# Altium PCB 4Z_PCB_2.PcbDoc (part 1 of 2)
Units mm, origin at the board's own origin, x right, y up, seen from the top; angles counter-clockwise.
Board outline 89.86 x 89.86 mm, 2 copper layers (Top Layer, Bottom Layer); 100 components, 102 nets, 472 pads, 154 vias.
Unrouted connection lines stored in the file: 1.
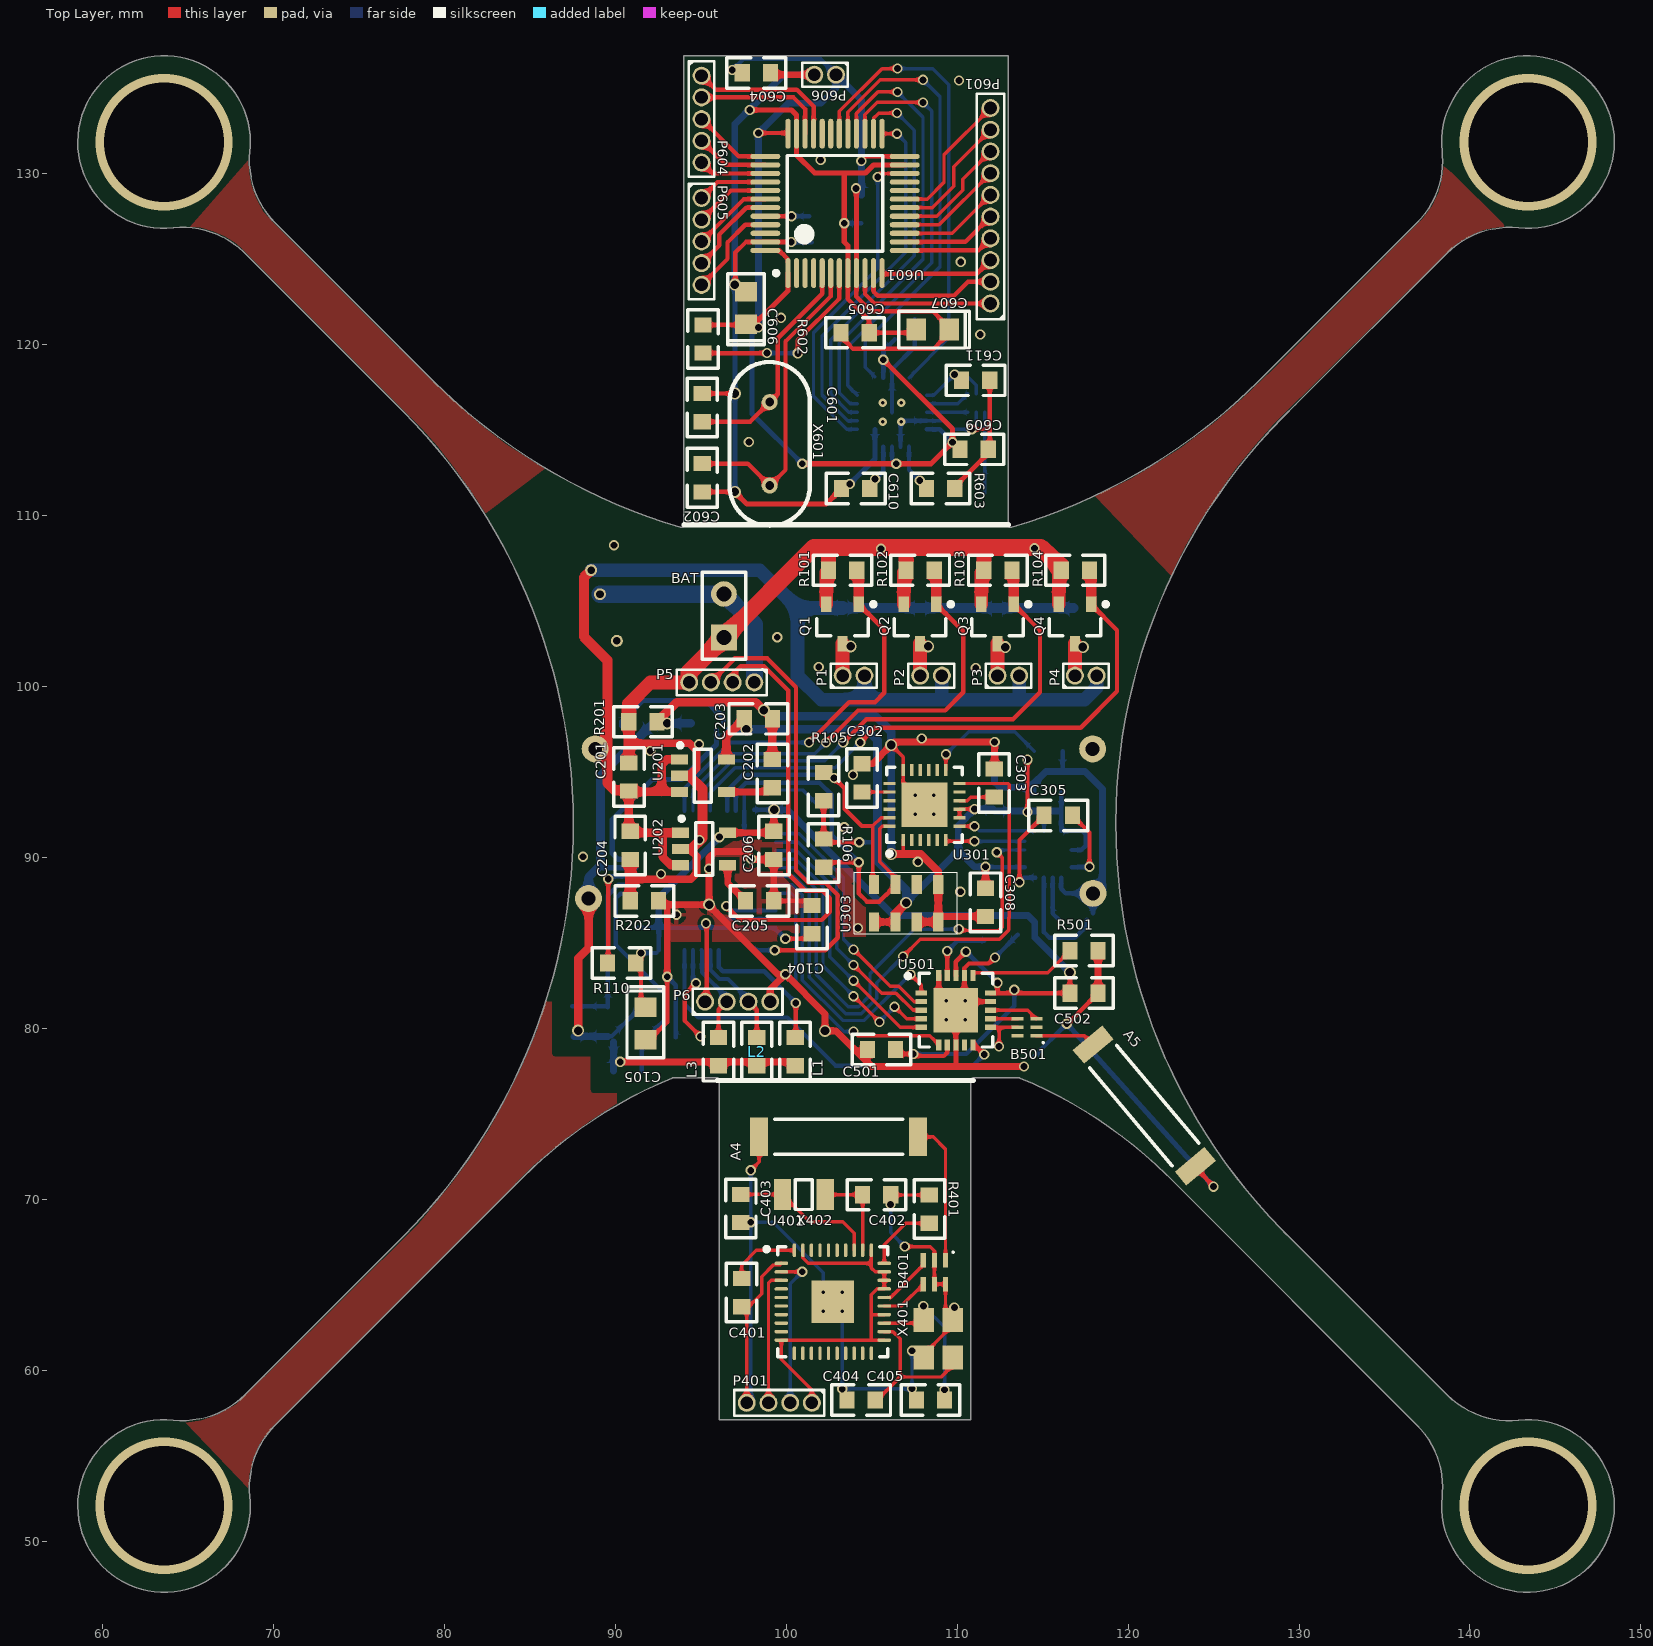
[diagram p0: Top Layer view]
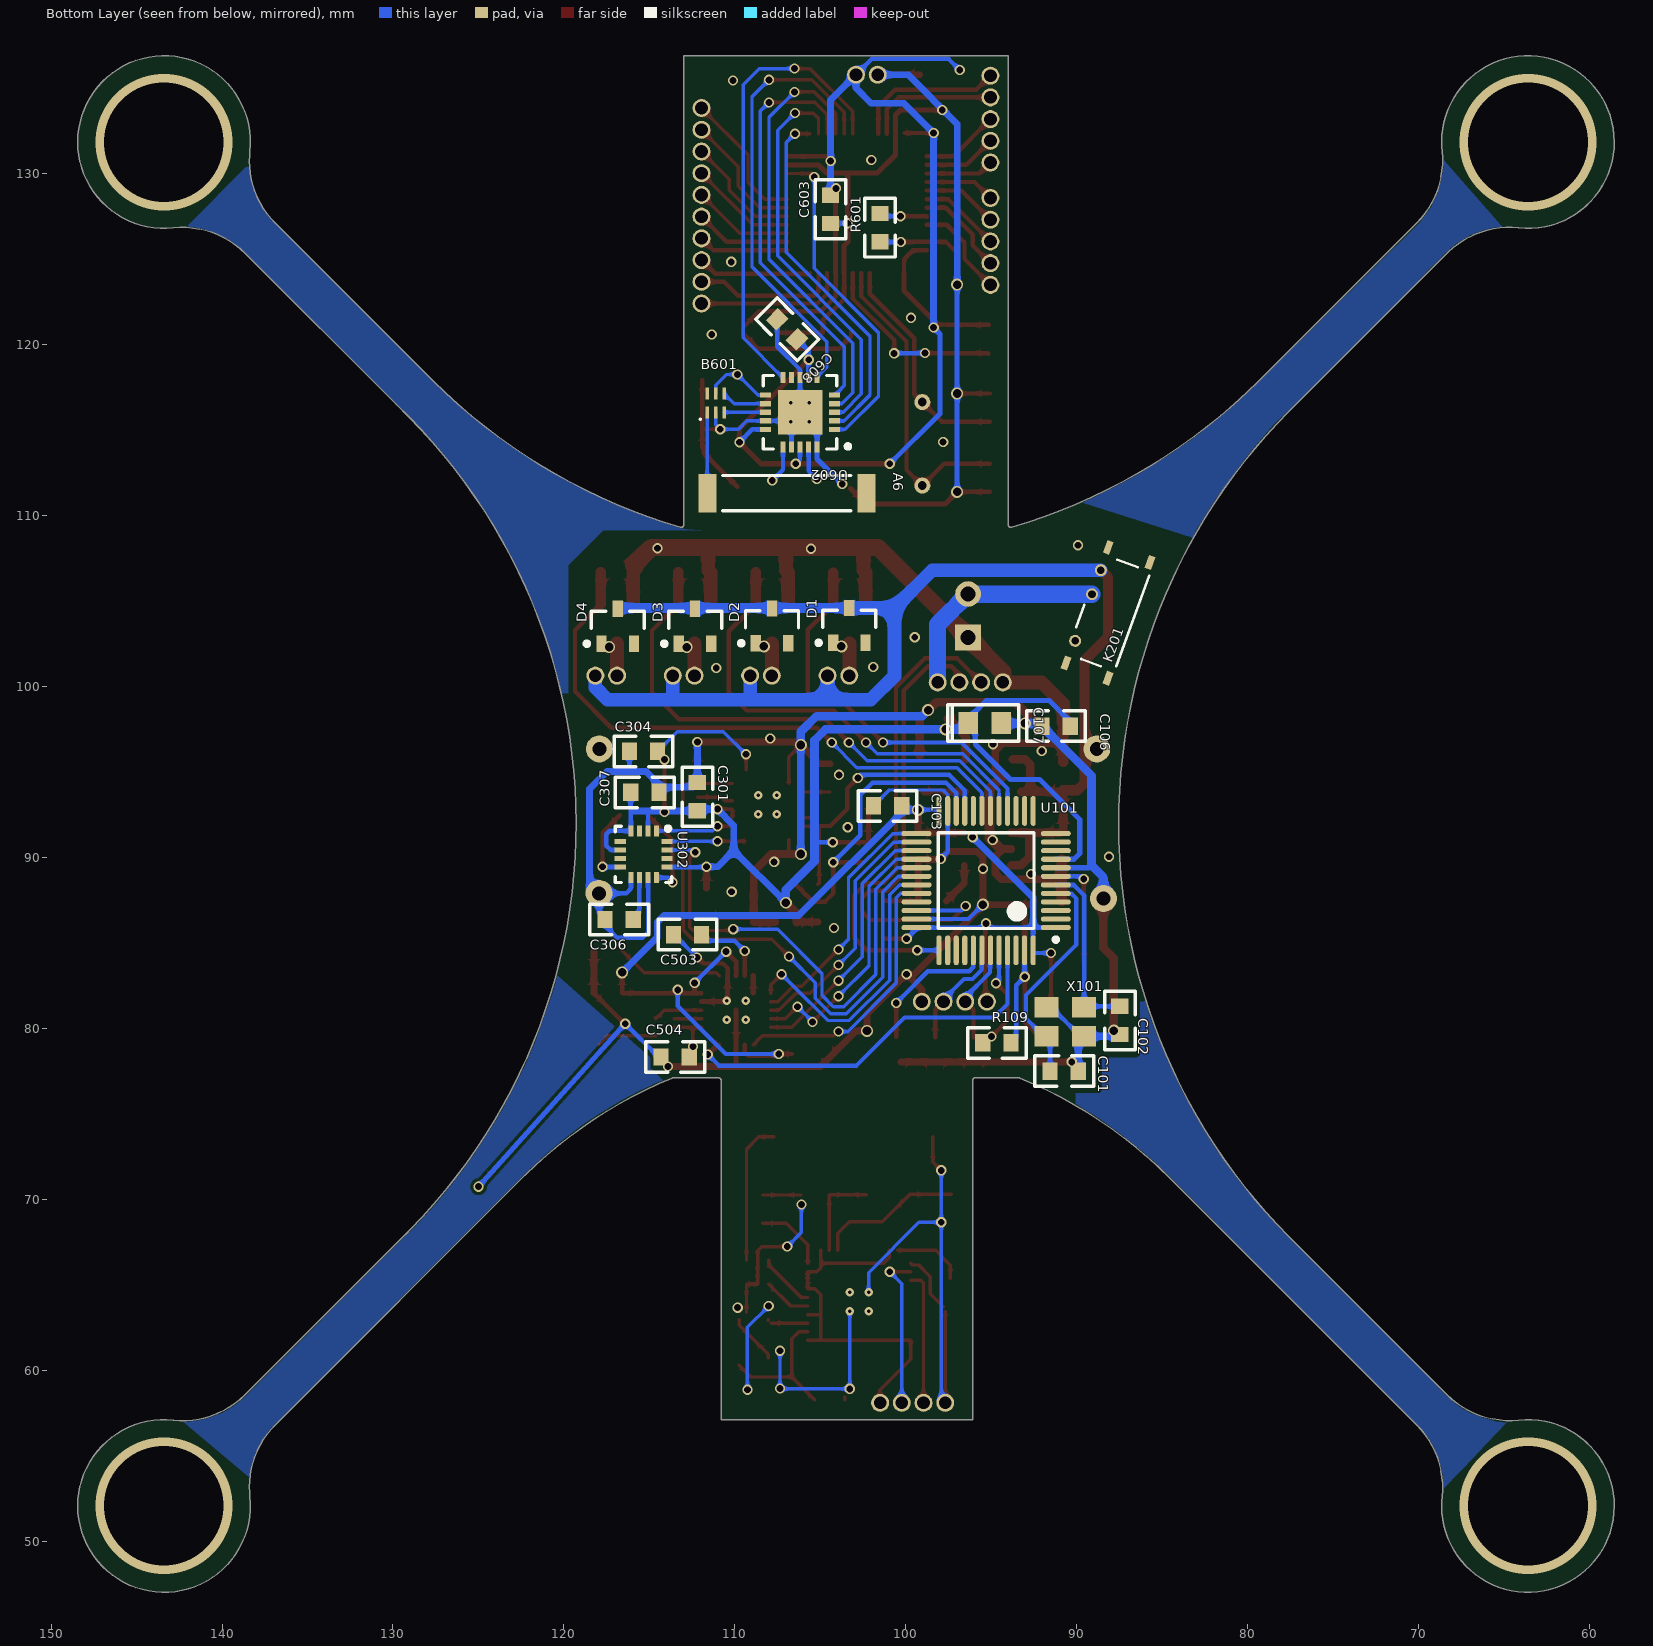
[diagram p1: Bottom Layer view, seen from below]

## Layer stack, top to bottom
Top Solder: solder mask 0.0102, Solder Resist, Dk 3.5
Top Layer: signal copper 0.0356
Dielectric 1: dielectric 0.32, FR-4, Dk 4.8
Bottom Layer: signal copper 0.0356
Bottom Solder: solder mask 0.0102, Solder Resist, Dk 3.5

## Board outline
64.166,57.09 ccw(c63.626,52.069) 68.676,52.069 ccw(c63.626,52.069) 68.647,52.609 cw(c73.768,53.16) 70.126,56.802 84.588,71.264 cw(c103.507,52.345) 93.329,77.089 cw(c93.387,76.95) 93.387,77.1 95.957,77.1 cw(c95.957,76.95) 96.107,76.95 96.107,57.1 110.807,57.1 110.807,76.95 cw(c110.957,76.95) 110.957,77.1 113.627,77.1 cw(c113.627,76.95) 113.684,77.089 cw(c103.507,52.345) 122.26,71.428 cw(c122.167,71.31) 122.273,71.416 136.888,56.802 ccw(c136.782,56.695) 136.888,56.802 cw(c133.246,53.16) 138.397,53.16 cw(c133.246,53.16) 138.367,52.609 ccw(c143.388,52.069) 148.437,52.069 ccw(c143.388,52.069) 142.848,57.09 cw(c142.297,62.211) 138.687,58.538 cw(c138.787,58.649) 138.681,58.543 138.665,58.559 cw(c138.772,58.665) 138.665,58.559 cw(c138.772,58.665) 138.664,58.56 ccw(c142.297,62.211) 138.665,58.559 ccw(c142.297,62.211) 138.667,58.557 cw(c138.772,58.665) 138.665,58.559 138.655,58.569 129.417,67.807 ccw(c153.136,91.956) 129.417,67.807 cw(c153.136,91.956) 128.987,68.237 cw(c153.136,91.956) 129.803,116.479 138.655,125.331 cw(c142.297,121.689) 142.848,126.81 ccw(c143.388,131.831) 148.437,131.831 ccw(c143.388,131.831) 138.367,131.291 cw(c133.246,130.74) 138.397,130.74 cw(c133.246,130.74) 136.888,127.098 ccw(c136.782,127.205) 136.888,127.098 127.65,117.86 cw(c127.543,117.966) 127.649,117.859 cw(c103.507,142.17) 113.191,109.306 cw(c113.149,109.45) 112.998,109.45 112.998,136.88 94.015,136.88 94.015,109.45 cw(c93.865,109.45) 93.822,109.306 cw(c103.507,142.17) 79.365,117.859 cw(c79.471,117.966) 79.364,117.86 79.365,117.859 79.364,117.86 70.126,127.098 ccw(c70.232,127.205) 70.126,127.098 cw(c73.768,130.74) 68.647,131.291 ccw(c63.626,131.831) 68.676,131.831 ccw(c63.626,131.831) 64.166,126.81 cw(c64.717,121.689) 68.27,125.417 cw(c68.18,125.297) 68.286,125.403 68.359,125.331 77.597,116.093 cw(c77.491,115.986) 77.598,116.092 cw(c53.33,91.95) 87.561,91.95 cw(c53.33,91.95) 77.598,67.808 cw(c77.491,67.914) 77.597,67.807 77.598,67.808 77.597,67.807 68.359,58.569 ccw(c68.252,58.675) 68.359,58.569 cw(c64.717,62.211)

## Design rules (kind name [scope] priority, off if disabled: settings)
Clearance [All] p1: gap=0.2
PolygonConnect [All] p1: connectstyle=Relief reliefconductorwidth=0.254 reliefentries=4 polygonreliefangle="90 Angle" airgapwidth=0.254
RoutingVias [All] p1: holewidth=0.4 width=0.6 viastyle="Through Hole" minholewidth=0.4 minwidth=0.6 maxholewidth=7 maxwidth=8
SolderMaskExpansion [All] p1: expansion=0.102
Width [All] p1: maxlimit=1 minlimit=0.2 preferedwidth=0.254 minimp=50.000000 maximp=50.000000 favimp=50.000000
30 further rules are at their usual default settings.

## Classes and differential pairs
component class 24L10S: A6 B601 C601 C602 C603 C604 C605 C606 C607 C608 C609 C610 C611 P601 P604 P605 P606 R601 R602 R603 U601 U602 X601
component class 4Z_PCB_2: C101 C102 C103 C104 C105 C106 C107 D1 D2 D3 D4 L1 L2 L3 P1 P2 P3 P4 P5 P6 Q1 Q2 Q3 Q4 R101 R102 R103 R104 R105 R106 R109 R110 U101 X101
component class IIC_Sensor: C301 C302 C303 C304 C305 C306 C307 C308 U301 U302 U303
component class nRF24L01: A5 B501 C501 C502 C503 C504 R501 U501
component class Power: BAT C201 C202 C203 C204 C205 C206 K201 R201 R202 U201 U202
component class Bluetooth: A4 B401 C401 C402 C403 C404 C405 P401 R401 U401 X401 X402

## Components (designator, comment, footprint, x,y, rotation, side; value= is the part's Value field where it differs from the comment)
A4 "AN9520-245" AN9520-245 103.08,73.65 r180 top locked
A5 "AN9520-245" AN9520-245 120.95,75.49 r310 top locked
A6 "AN9520-245" AN9520-245 106.97,111.305 r180 bottom locked
B401 "2450BM15A0002E" 2450BM15A0002 108.675,65.735 r270 top locked
B501 "2450BN14A0002" 2450BM14A0002 114.09,80.06 r180 top locked
B601 "2450BN14A0002" 2450BM14A0002 111.13,116.57 r90 bottom locked
BAT "BAT" XH254 96.37,102.86 r90 top locked
C101 "20pF" 0603 90.72,77.47 r0 bottom locked
C102 "20pF" 0603 87.52,80.44 r90 bottom locked
C103 "100nF" 0603 101.095,93.04 r180 bottom locked
C104 "100nF" 0603 101.55,86.38 r270 top locked
C105 "C0805" 0805 91.775,80.285 r270 top locked
C106 "100nF" 0603 91.245,97.705 r180 bottom locked
C107 "C0805" 0805 95.395,97.855 r180 bottom locked
C201 "0.1uF" 0603 90.836,94.724 r270 top locked
C202 "0.01uF" 0603 99.233,94.924 r270 top locked
C203 "2.2uF" 0603 98.403,98.074 r180 top locked
C204 "0.1uF" 0603 90.858,90.674 r90 top locked
C205 "0.01uF" 0603 98.483,87.424 r180 top locked
C206 "2.2uF" 0603 99.258,90.674 r90 top locked
C301 "10nF" 0603 112.171,93.57 r270 bottom locked
C302 "2.2nF" 0603 104.475,94.67 r270 top locked
C303 "100nF" 0603 112.2,94.371 r270 top locked
C304 "100nF" 0603 115.375,96.225 r180 bottom locked
C305 "0.22uF" 0603 115.895,92.485 r0 top locked
C306 "4.7uF" 0603 116.795,86.395 r180 bottom locked
C307 "100nF" 0603 115.25,93.77 r0 bottom locked
C308 "100nF" 0603 111.635,87.345 r90 top locked
C401 "1uF" 0603 97.43,64.57 r270 top locked
C402 "" 0603 105.32,70.24 r180 top locked
C403 "" 0603 97.325,69.44 r90 top locked
C404 "" 0603 104.37,58.293 r0 top locked
C405 "" 0603 108.475,58.235 r180 top locked
C501 "10nF" 0603 105.56,78.79 r0 top locked
C502 "100nF" 0603 117.4,82.09 r0 top locked
C503 "33nF" 0603 112.8,85.51 r180 bottom locked
C504 "2.2nF" 0603 113.52,78.35 r180 bottom locked
C601 "22p" 0603 95.128,116.325 r270 top locked
C602 "22p" 0603 95.07,112.175 r90 top locked
C603 "100nF" 0603 104.44,127.875 r90 bottom locked
C604 "100nF" 0603 98.285,135.85 r180 top locked
C605 "10nF" 0603 104.06,120.65 r180 top locked
C606 "10uF" 0805 97.655,122.12 r90 top locked
C607 "1uF" 0805 108.58,120.864 r180 top locked
C608 "10nF" 0603 106.945,120.92 r225 bottom locked
C609 "100nF" 0603 111.03,113.835 r180 top locked
C610 "33nF" 0603 104.05,111.6 r0 top locked
C611 "2.2nF" 0603 111.115,117.87 r180 top locked
D1 "BAT54" BAT54 103.31,103.735 r90 bottom locked
D2 "BAT54" BAT54 107.835,103.71 r90 bottom locked
D3 "BAT54" BAT54 112.335,103.685 r90 bottom locked
D4 "BAT54" BAT54 116.86,103.685 r90 bottom locked
K201 "32开关" 32k 88.18,104.3 r290 bottom locked
L1 "" 0603 100.5,78.61 r90 top locked
L2 "" 0603 98.26,78.61 r90 top locked
L3 "" 0603 96.02,78.61 r90 top locked
P1 "DIP_2" DIP_2 103.95,100.63 r0 top locked
P2 "DIP_2" DIP_2 108.48,100.63 r0 top locked
P3 "DIP_2" DIP_2 113,100.63 r0 top locked
P4 "DIP_2" DIP_2 117.53,100.63 r0 top locked
P5 "DIP_4" DIP_4 96.24,100.23 r180 top locked
P6 "" DIP_4 97.17,81.56 r0 top locked
P401 "DIP_4" DIP_4 99.607,58.098 r180 top locked
P601 "DIP10_1.27mm" DIP10_1.27mm 111.96,128.105 r90 top locked
P604 "DIP_5_1.27mm" DIP_5_1.27mm 95.06,133.175 r270 top locked
P605 "DIP_5_1.27mm" DIP_5_1.27mm 95.06,126.02 r270 top locked
P606 "DIP_2" DIP_2 102.29,135.77 r180 top locked
Q1 "PMV31XN" SOT23-TO236AB 103.307,103.651 r270 top locked
Q2 "PMV31XN" SOT23-TO236AB 107.837,103.651 r270 top locked
Q3 "PMV31XN" SOT23-TO236AB 112.366,103.651 r270 top locked
Q4 "PMV31XN" SOT23-TO236AB 116.896,103.651 r270 top locked
R101 "10K" 0603 103.33,106.76 r180 top locked
R102 "10K" 0603 107.87,106.76 r180 top locked
R103 "10K" 0603 112.41,106.76 r180 top locked
R104 "10K" 0603 116.94,106.76 r180 top locked
R105 "2.2K" 0603 102.17,94.11 r90 top locked
R106 "2.2K" 0603 102.228,90.27 r270 top locked
R109 "100K" 0603 94.71,79.18 r180 bottom locked
R110 "22K" 0603 90.36,83.85 r0 top locked
R201 "0R" 0603 91.657,97.899 r180 top locked
R202 "0R" 0603 91.737,87.424 r180 top locked
R401 "56K" 0603 108.415,69.45 r270 top locked
R501 "22K" 0603 117.4,84.57 r0 top locked
R601 "100K" 0603 101.55,126.8 r90 bottom locked
R602 "22K" 0603 95.115,120.29 r90 top locked
R603 "22K" 0603 109.015,111.6 r0 top locked
U101 "STM32F103CB" LQFP48 95.31,88.64 r0 bottom locked
U201 "TPS79328" TPS793xx 95.133,94.774 r0 top locked
U202 "TPS79328" TPS793xx 95.213,90.49 r0 top locked
U301 "MPU6050" MPU6050 108.1,93.07 r90 top locked
U302 "HMC5883L" HMC5883L 115.34,90.18 r270 bottom locked
U303 "MS5611-01BA03" MS5611-01BA03 107,87.32 r90 top locked
U401 "CC254*" CC254x 102.735,64.01 r0 top locked
U501 "nRF24L01" nRF24L01 109.93,81.06 r0 top locked
U601 "STM32F103CB" LQFP48 102.865,128.245 r90 top locked
U602 "nRF24L01" nRF24L01 106.195,116.03 r0 bottom locked
X101 "X2" 3225 90.69,80.38 r180 bottom locked
X401 "32M" 3225 108.91,61.845 r90 top locked
X402 "32.768K" 3215 99.795,70.28 r0 top locked
X601 "8M" X1 99.045,114.18 r270 top locked

## Footprints (in the part's own frame and the unit in brackets; to place one, negate y for a bottom-side part, rotate by r counter-clockwise, add the part's x,y. Pads: shape width x height; smd on the part's side, far side on the other; paste and mask are expansions set on the pad)
32k [mm]
  rect 0.8x0.4 smd: 0(-3.6,-1.3) 0(-3.6,1.3) 0(3.6,1.3) 0(3.6,-1.3)
  round 0.7 hole 0.45: 1(-2.2,-1.25) 2(-0.7,-1.25) 3(2.2,-1.25)
  silkscreen extent -3.1,-1.48 3.08,1.52
0603 [mil]
  rect 35x40 smd: 1(-31.54,-1.14) 2(33.46,-1.14)
  silkscreen extent -67,-36 68,34
0805 [mm]
  rect 1.14x1.27 smd: 1(-0.955,0) 2(0.955,0)
  silkscreen extent -2.15,-1.08 2,1.08
2450BM14A0002 [mm] "Chip Array, Flat, 6-Leads, Pitch 0.50mm,  Body 1.60x0.80mm,  IPC Medium Density"
  rect 0.7x0.2 smd: 1(-0.55,0.5) 2(-0.55,0) 3(-0.55,-0.5) 4(0.55,-0.5) 5(0.55,0) 6(0.55,0.5)
  silkscreen extent -1,0.85 -0.9,0.95, body extent -0.45,-0.85 0.45,0.85, height 0.7
2450BM15A0002 [mm]
  rect 0.85x0.3 smd: 1(-0.7,0.65) 2(-0.7,0) 3(-0.7,-0.65) 4(0.7,-0.65) 5(0.7,0) 6(0.7,0.65)
  silkscreen extent -1.22,1.05 -1.13,1.15, body extent -0.67,-1.05 0.67,1.05, height 0.8
3215 [mm]
  rect 1x1.8 smd: 1(0,0) 2(2.5,0)
  silkscreen extent 0.75,-0.88 1.75,0.87
3225 [mm]
  rect 1.4x1.2 smd: 1(-1.1,-0.85) 2(1.1,-0.85) 3(1.1,0.85) 4(-1.1,0.85)
AN9520-245 [mm] "Chip Capacitor, 2-Leads, Body 9.50x2.10mm, IPC Medium Density"
  rect 1.05x2.25 smd: 1(-4.65,0) 2(4.65,0)
  silkscreen extent -3.75,-1.03 3.75,1.02, body extent -4.8,-1.1 4.8,1.1, height 1.2
BAT54 [mm] "SOT23, 3-Leads, Body 2.95x2.48mm, Pitch 0.95mm, IPC Medium Density"
  rect 0.95x0.6 smd: 1(-1.19,0.95) 2(-1.19,-0.95) 3(0.85,0)
  silkscreen extent -1.31,-1.55 0.71,1.93
CC254x [mm] "QFN, 40-Leads, Body 6.00x6.00mm, Pitch 0.50mm, Thermal Pad 4.82x4.82mm, IPC Medium Density"
  oval 0.8x0.2 smd: 1(-3.01,2.25) 2(-3.01,1.75) 3(-3.01,1.25) 4(-3.01,0.75) 5(-3.01,0.25) 6(-3.01,-0.25) 7(-3.01,-0.75) 8(-3.01,-1.25) 9(-3.01,-1.75) 10(-3.01,-2.25) 21(3.01,-2.25) 22(3.01,-1.75) 23(3.01,-1.25) 24(3.01,-0.75) 25(3.01,-0.25) 26(3.01,0.25) 27(3.01,0.75) 28(3.01,1.25) 29(3.01,1.75) 30(3.01,2.25)
  oval 0.2x0.8 smd: 11(-2.25,-3.01) 12(-1.75,-3.01) 13(-1.25,-3.01) 14(-0.75,-3.01) 15(-0.25,-3.01) 16(0.25,-3.01) 17(0.75,-3.01) 18(1.25,-3.01) 19(1.75,-3.01) 20(2.25,-3.01) 31(2.25,3.01) 32(1.75,3.01) 33(1.25,3.01) 34(0.75,3.01) 35(0.25,3.01) 36(-0.25,3.01) 37(-0.75,3.01) 38(-1.25,3.01) 39(-1.75,3.01) 40(-2.25,3.01)
  rect 2.5x2.5 smd: 41(0,0)
  silkscreen extent -4,-3.23 3.23,3.23, body extent -3.08,-3.08 3.08,3.08, height 1
DIP10_1.27mm [mm]
  round 1.05 hole 0.74: 1(-5.715,0) 2(-4.445,0) 3(-3.175,0) 4(-1.905,0) 5(-0.635,0) 6(0.635,0) 7(1.905,0) 8(3.175,0) 9(4.445,0) 10(5.715,0)
  silkscreen extent -6.62,-0.8 6.55,0.8
DIP_2 [mm]
  round 1.05 hole 0.74: 1(-0.635,0) 2(0.635,0)
  silkscreen extent -1.33,-0.7 1.35,0.7
DIP_4 [mm]
  round 1.05 hole 0.74: 1(-1.905,0) 2(-0.635,0) 3(0.635,0) 4(1.905,0)
  silkscreen extent -2.64,-0.77 2.62,0.75
DIP_5_1.27mm [mm]
  round 1.05 hole 0.74: 1(-2.54,0) 2(-1.27,0) 3(0,0) 4(1.27,0) 5(2.54,0)
  silkscreen extent -3.37,-0.75 3.38,0.75
HMC5883L [mm]
  rect 0.65x0.3 smd: 1(-1.37,0.75) 2(-1.37,0.25) 3(-1.37,-0.25) 4(-1.37,-0.75) 9(1.37,-0.75) 10(1.37,-0.25) 11(1.37,0.25) 12(1.37,0.75)
  rect 0.3x0.65 smd: 5(-0.75,-1.37) 6(-0.25,-1.37) 7(0.25,-1.37) 8(0.75,-1.37) 13(0.75,1.37) 14(0.25,1.37) 15(-0.25,1.37) 16(-0.75,1.37)
  silkscreen extent -1.65,-1.65 1.65,1.65
LQFP48 [mm] "TSQFP, 48-Leads, Body 7.00x7.00mm, Pitch 0.50mm, IPC Medium Density"
  oval 1.75x0.3 smd: 1(-4.075,2.75) 2(-4.075,2.25) 3(-4.075,1.75) 4(-4.075,1.25) 5(-4.075,0.75) 6(-4.075,0.25) 7(-4.075,-0.25) 8(-4.075,-0.75) 9(-4.075,-1.25) 10(-4.075,-1.75) 11(-4.075,-2.25) 12(-4.075,-2.75) 25(4.075,-2.75) 26(4.075,-2.25) 27(4.075,-1.75) 28(4.075,-1.25) 29(4.075,-0.75) 30(4.075,-0.25) 31(4.075,0.25) 32(4.075,0.75) 33(4.075,1.25) 34(4.075,1.75) 35(4.075,2.25) 36(4.075,2.75)
  oval 0.3x1.75 smd: 13(-2.75,-4.075) 14(-2.25,-4.075) 15(-1.75,-4.075) 16(-1.25,-4.075) 17(-0.75,-4.075) 18(-0.25,-4.075) 19(0.25,-4.075) 20(0.75,-4.075) 21(1.25,-4.075) 22(1.75,-4.075) 23(2.25,-4.075) 24(2.75,-4.075) 37(2.75,4.075) 38(2.25,4.075) 39(1.75,4.075) 40(1.25,4.075) 41(0.75,4.075) 42(0.25,4.075) 43(-0.25,4.075) 44(-0.75,4.075) 45(-1.25,4.075) 46(-1.75,4.075) 47(-2.25,4.075) 48(-2.75,4.075)
  silkscreen extent -4.2,-2.8 2.8,3.57, body extent -3.5,-3.5 3.5,3.5, height 1.6
MPU6050 [mm]
  rect 0.7x0.2 smd: 1(-2.05,1.25) 2(-2.05,0.75) 3(-2.05,0.25) 4(-2.05,-0.25) 5(-2.05,-0.75) 6(-2.05,-1.25) 13(2.05,-1.25) 14(2.05,-0.75) 15(2.05,-0.25) 16(2.05,0.25) 17(2.05,0.75) 18(2.05,1.25)
  rect 0.2x0.7 smd: 7(-1.25,-2.05) 8(-0.75,-2.05) 9(-0.25,-2.05) 10(0.25,-2.05) 11(0.75,-2.05) 12(1.25,-2.05) 19(1.25,2.05) 20(0.75,2.05) 21(0.25,2.05) 22(-0.25,2.05) 23(-0.75,2.05) 24(-1.25,2.05)
  rect 2.6x2.7 smd: 25(0,0)
  silkscreen extent -2.97,-2.2 2.2,2.2, body extent -2.05,-2.05 2.05,2.05, height 0.85
MS5611-01BA03 [mm]
  rect 1.1x0.6 smd: 1(-1.1,1.85) 2(-1.1,0.6) 3(-1.1,-0.65) 4(-1.1,-1.9) 5(1.1,-1.9) 6(1.1,-0.65) 7(1.1,0.6) 8(1.1,1.85)
  round 0.2 on Top Overlay: ""(-1.5,2.7)
  silkscreen extent -1.8,-3 1.8,3
nRF24L01 [mm]
  rect 0.65x0.3 smd: 1(-2.025,1) 2(-2.025,0.5) 3(-2.025,0) 4(-2.025,-0.5) 5(-2.025,-1) 11(2.025,-1) 12(2.025,-0.5) 13(2.025,0) 14(2.025,0.5) 15(2.025,1)
  rect 0.3x0.65 smd: 6(-1,-2.025) 7(-0.5,-2.025) 8(0,-2.025) 9(0.5,-2.025) 10(1,-2.025) 16(1,2.025) 17(0.5,2.025) 18(0,2.025) 19(-0.5,2.025) 20(-1,2.025)
  rect 2.6x2.6 smd: 21(0,0)
  silkscreen extent -2.92,-2.15 2.15,2.15, body extent -2,-2 2,2, height 0.95
SOT23-TO236AB [mm] "SOT23, 3-Leads, Body 2.90x2.30mm, Pitch 0.95mm, IPC Medium Density"
  rect 0.9x0.6 smd: 1(-1.15,0.95) 2(-1.15,-0.95) 3(1.15,0)
  silkscreen extent -1.27,-1.5 0.7,1.93, body extent -0.7,-1.5 0.7,1.5, height 1.1
TPS793xx [mm] "SOT23, 6-Leads, Body 2.90x2.80mm, Pitch 0.95mm, IPC Medium Density"
  rect 1x0.6 smd: 1(-1.375,0.95) 2(-1.375,0) 3(-1.375,-0.95) 4(1.375,-0.95) 5(1.375,0.95)
  silkscreen extent -1.45,-1.55 0.5,1.9, body extent -0.88,-1.52 0.87,1.53, height 1.45
X1 [mm]
  round 0.94 hole 0.52: 1(2.44,0) 2(-2.44,0)
  silkscreen extent -4.79,-2.35 4.79,2.35
XH254 [mm]
  rect 1.5x1.5 hole 0.9: 1(0,0)
  round 1.5 hole 0.9: 2(2.54,0)
  silkscreen extent -1.27,-1.27 3.81,1.27

## Part data
A4 A5 A6: "antenna"
B401: "CC2541"
B501 B601: "nRF24L01"
C101 C102 C103 C104 C106 C201 C202 C203 C204 C205 C206 C301 C302 C303 C304 C305 C306 C307 C308 C401 C402 C403 C404 C405 C501 C502 C503 C504 C601 C602 C603 C604 C605 C608 C609 C610 C611: library part C0603
C606 C607: library part C0805
L1 L2 L3 R101 R102 R103 R104 R105 R106 R109 R110 R201 R202 R401 R501 R601 R602 R603: library part R0603
P6: library part DIP_4
U201 U202: library part TPS793xx
U401: library part CC254x
X101: "3225"
X401: library part X2, "3225"
X402: library part X3, "3215"
X601: library part X1

## Free pads (board coordinates)
  round 1.575 hole 0.813: 0(88.45,87.59) 0(88.84,96.34) 0(117.93,96.34) 0(117.95,87.895)

## Via types
v1: diameter 0.6, hole 0.4, Top Layer to Bottom Layer, 116 vias
v2: diameter 0.7, hole 0.5, Top Layer to Bottom Layer, 18 vias
v3: diameter 0.5, hole 0.2, Top Layer to Bottom Layer, 16 vias
v4: diameter 8, hole 7, Top Layer to Bottom Layer, 4 vias

## Nets (pads, with @x,y where several pads share a name; then routed paths per layer and width w, separated by ;. In a path a pad name is that pad's centre, name@x,y a point inside that pad or via, vN(x,y) a via of type N, cw(c..) or ccw(c..) an arc to the next point about the centre after c; other vN are vias at no path point)
24L01_CE: U601.22 U602.1 | length 19.4
  Top Layer w0.2: v1(105.36,129.79) 105.565,129.995 U601.22@106.94,129.995
  Bottom Layer w0.2: U602.1@104.17,115.03 103.548,115.03 101.605,116.973 101.605,120.688 105.36,124.443 v1(105.36,129.79)
24L01_INT: U601.29 U602.6 | length 26.3
  Top Layer w0.2: U601.29@103.615,132.32 103.615,133.566 105.519,135.47 v1(108.01,135.47)
  Bottom Layer w0.2: U602.6@105.195,118.1 104.625,118.67 104.625,120.165 109.005,124.545 109.005,134.475 v1(108.01,135.47)
AGND: C101.1 C102.1 C106.1 C107.2 C202.1 C203.1 C301.1 C302.1 C303.1 C304.1 C306.1 C307.1 C308.1 L1.1 L2.1 L3.1 pad.0@88.45,87.59 pad.0@117.95,87.895 R201.1 U101.8 U301.1 U301.18 U301.25 U302.9 U302.11 U303.3 U303.4 U303.5 X101.2 X101.4 | length 136.9
  Top Layer w0.2: v2(106.15,96.57) 106.85,95.87 U301.18@106.85,95.12 U301.25@106.85,94.32 ; 106.85,90.245 U301.1@106.85,91.02 ; C303.1@112.171,95.172 C303.1@112.2,95.201
  Top Layer w0.4: C302.1@104.446,95.471 105.051,95.471 v2(106.15,96.57) v2@106.325,96.745 ; 109.224,86.544 C308.1@111.664,86.544 ; C303.1@112.2,95.201 v1(112.2,96.745) ; v2@106.325,96.745 v1(112.2,96.745) ; v2@106.325,96.745 v1(112.2,96.745) ; v1(90.3,78.04) 100.298,78.04 v1(90.3,78.04)
  Top Layer w0.45: v2(106.15,90.195) 107.875,90.195 108.9,89.17 U303.5@108.9,88.42 U303.4@108.9,86.22 U303.3@107.65,86.22
  Top Layer w0.5: v2(87.84,79.87) 87.84,84.09 88.45,84.7 pad.0@88.45,87.59 ; C202.1@99.204,95.949 C203.1@99.204,98.103 v2(98.7,98.607) 98.233,99.074 93.604,99.074 ; R201.1@92.702,98.173 R201.1@92.458,97.928 R201.1@92.702,98.173 ; R201.1@92.702,98.173 93.604,99.074 ; R201.1@92.702,98.173 93.604,99.074
  Bottom Layer w0.2: C301.1@112.2,94.371 C301.1@112.476,94.095 ; C307.1@114.153,94.095 C307.1@114.449,93.799
  Bottom Layer w0.254: X101.2@89.59,79.53 89.79,79.53 X101.4@91.49,81.23 ; U302.11@115.09,88.81 115.078,88.798 115.078,85.626 115.408,85.297 116.892,85.297 117.596,86.001 C306.1@117.596,86.366 ; U302.9@116.09,88.81 116.09,88.157 116.352,87.895 pad.0@117.95,87.895 C306.1@117.95,86.72 ; 116.176,95.069 C304.1@116.176,96.196
  Bottom Layer w0.3: 89.295,89.39 U101.8@91.235,89.39
  Bottom Layer w0.4: C301.1@112.2,94.371 v1(112.2,96.745) ; C301.1@112.476,94.095 C307.1@114.153,94.095 ; C307.1@114.449,93.799 114.449,94.269 115.2,95.02 117.475,95.02 117.822,94.673 118.505,93.99 118.505,88.45 pad.0@117.95,87.895 ; C102.1@87.6,79.53 X101.2@89.59,79.53 C102.1@87.6,79.53 ; C101.1@89.919,77.499 89.919,79.201 C101.1@89.919,77.499
  Bottom Layer w0.45: v2(106.15,90.195) v2(106.15,96.57)
  Bottom Layer w0.5: pad.0@88.45,87.59 88.45,88.835 89.15,89.535 89.15,94.78 C106.1@92.046,97.676 ; C106.1@92.205,97.835 v2(93.04,97.835) C107.2@94.42,97.835 ; v2(98.7,98.607) 99.047,98.26 105.23,98.26 106.15,97.34 v2(106.15,96.57)
  other v1: 104.205,85.87 110.195,87.985 107.71,89.735 103.4,91.76 103.92,94.825 107.94,96.95
  other v3: 107.55,92.52 108.65,92.52 107.55,93.62 108.65,93.62
AVCC: C106.2 C107.1 C203.2 C301.2 C304.2 C307.2 C308.2 R105.1 R106.1 U101.9 U201.5 U301.8 U301.9 U301.13 U302.2 U302.4 U302.6 U302.13 U303.1 U303.2 | length 95.3
  Top Layer w0.2: U301.13@109.35,95.12 v1@109.35,96.02 ; U301.8@110.15,92.32 U301.9@110.15,92.82 v1(111.025,92.82)
  Top Layer w0.254: R106.1@102.39,90.88 v1(104.28,90.88) ; v1(114.12,92.645) v1(114.12,95.715)
  Top Layer w0.3: R106.1@102.199,91.071 R105.1@102.199,93.309
  Top Layer w0.4: U303.1@105.15,86.22 U303.2@106.25,86.22 ; v1(111.025,92.82) v1@111.075,92.82 ; C308.2@111.665,88.196 v1(111.665,89.445)
  Top Layer w0.5: U201.5@96.508,95.724 96.508,97.058 ; U303.2@106.4,86.22 106.4,86.72 v2(107.025,87.345) ; 96.508,97.058 97.305,97.855 C203.2@97.553,98.103 ; 96.508,97.058 C203.2@97.553,98.103 ; 96.508,97.058 C203.2@97.553,98.103
  Bottom Layer w0.2: v1(109.355,96.025) 110.675,97.345 113.376,97.345 C304.2@114.525,96.196
  Bottom Layer w0.254: v1(104.28,90.88) 105.34,90.88 ; v1@111.68,89.43 U302.13@113.97,89.43 ; U302.2@115.09,91.55 115.09,92.67 ; 116.09,92.88 U302.4@116.09,91.55 117.32,91.55 117.525,91.345 117.525,90.683 117.287,90.445 ; 116.1,92.72 C307.2@116.1,93.799 ; U302.6@116.71,90.43 117.272,90.43
  Bottom Layer w0.3: C106.2@90.395,97.676 90.395,97.95 91.615,99.17 95.31,99.17 96.35,98.13 C107.1@96.35,97.855 ; U101.9@91.235,89.89 90.17,89.89 89.84,90.22 89.84,92.21 92.18,94.55 93.885,94.55 95.94,96.605 C107.1@95.94,97.445
  Bottom Layer w0.4: v2(107.025,87.345) 110.075,90.395 ; v1(111.665,89.445) 111.025,89.445 110.075,90.395 ; C301.2@112.1,92.82 v1(111.025,92.82) 110.075,91.87 110.075,90.395 ; C301.2@112.2,92.72 114.12,92.72 115.925,92.72 ; C301.2@112.2,92.72 115.925,92.72 ; C301.2@112.2,92.72 115.925,92.72
  Bottom Layer w0.5: C107.1@96.725,97.48 v2(97.68,97.48) 104.71,97.48 105.35,96.84 105.35,89.77 107.025,88.095 v2(107.025,87.345)
BAT+: BAT.2 K201.2 P5.1 | length 13.1
  Bottom Layer w1: K201.2@89.115,105.385 BAT.2@96.355,105.385 ; BAT.2@96.37,105.4 98.145,103.625 P5.1@98.145,100.23
BGND: A4.2 B401.2 B401.5 B401.6 C401.2 C402.1 C403.1 C404.1 C405.2 P401.4 R401.1 U401.1 U401.41 X401.2 X401.4 | length 56.4
  Top Layer w0.2: P401.4@97.702,58.098 C401.2@97.702,63.419 ; C401.2@97.82,63.72 98.572,64.473 98.572,65.473 99.259,66.16 99.625,66.16 U401.1@99.725,66.26 ; v1(97.94,71.695) 98.43,72.185 A4.2@98.43,73.65 ; C404.1@103.569,58.264 C404.1@103.569,58.414 ; C402.1@106.139,70.251 R401.1@108.386,70.251 ; v1(106.94,67.235) 108.445,67.235 108.675,67.005 B401.2@108.675,66.435 B401.5@108.675,65.035 B401.6@109.325,65.035 X401.2@109.325,63.38 ; X401.4@108.06,60.745 108.06,60.945 109.76,62.645 X401.2@109.76,62.945
  Bottom Layer w0.2: P401.4@97.702,58.098 97.935,58.331 v1(97.935,68.66) ; v1@97.935,71.69 v1(97.935,68.66) ; v3(102.185,64.56) 102.185,65.715 99.24,68.66 v1(97.935,68.66) ; v1@103.285,58.92 v3(103.285,63.46) ; v1(103.29,58.915) v1@107.345,58.915 ; v1(106.115,69.695) 106.115,68.06 v1(106.94,67.235) ; v1@107.365,58.935 v1(107.365,61.145) ; v1@109.845,63.625 v1(109.845,63.665)
  other v1: 107.37,58.93
  other v3: 102.185,63.46 103.285,64.56
BVCC: P401.1 U401.10 U401.21 U401.24 U401.27 U401.28 U401.29 U401.31 U401.39 | length 22.7
  Top Layer w0.2: U401.39@100.985,67.02 100.985,66.574 101.304,66.255 104.985,66.255 ; P401.1@101.512,58.098 101.512,58.857 99.725,60.645 U401.10@99.725,61.76 U401.21@105.745,61.76 ; U401.31@104.985,67.02 104.985,66.255 ; 104.99,61.785 104.99,64.425 105.325,64.76 U401.27@105.745,64.76 ; 105,63.26 U401.24@105.745,63.26 ; U401.28@105.745,65.26 U401.27@105.745,64.76 ; 104.985,66.255 104.985,65.985 105.21,65.76 U401.29@105.745,65.76 U401.27@105.745,64.76
DGND: A5.2 C103.1 C104.1 C105.2 C205.1 C206.1 C501.1 C502.2 C503.1 C504.1 P6.4 R109.2 R202.1 R501.2 U101.23 U101.35 U101.47 U501.8 U501.14 U501.17 U501.20 U501.21 | length 108.6
  Top Layer w0.254: C105.2@91.775,79.33 92.015,79.33 93.05,80.365 v1(93.05,83.02) ; C205.1@99.284,87.453 C104.1@101.249,87.453 ; U501.17@110.43,83.085 110.43,83.523 110.702,83.795 111.865,83.795 v1(112.215,84.145) ; v1(116.42,80.27) 116.459,80.27 117.029,80.84 C502.2@118.25,82.061 ; A5.2@123.939,71.928 v1(124.995,70.74)
  Top Layer w0.3: U501.21@108.93,82.06 U501.20@108.93,83.085 ; 109.93,77.86 U501.8@109.93,79.035 U501.21@109.93,81.06 ; U501.21@110.43,81.56 U501.14@111.955,81.56 U501.21@110.43,81.56 ; U501.21@110.43,81.56 U501.17@110.43,83.085 U501.21@110.43,81.56
  Top Layer w0.4: R202.1@92.538,87.453 R202.1@92.72,87.271 ; R202.1@92.761,87.23 v2(95.5,87.23) ; v1(93.05,83.02) 93.05,87.2 ; v1(97.97,89.91) 97.54,90.34 95.86,90.34 95.5,89.98 ; v1@98.007,89.873 C206.1@99.287,89.873 ; P6.4@99.075,81.56 99.075,82.28 v1(99.96,83.165) ; C205.1@99.284,87.453 C206.1@99.284,89.87 ; v1(113.915,77.77) 105,77.77 ; C502.2@118.25,82.061 R501.2@118.25,84.541 ; v2(95.5,87.23) 95.5,87.17 99.505,83.165 v1(99.96,83.165) ; v2(95.5,87.23) 95.5,89.98 ; v2(95.5,87.23) 95.5,89.98 ; v1(99.96,83.165) 102.28,80.845 v2(102.28,79.85) 102.92,79.85 ; 102.92,79.85 105,77.77 ; 102.92,79.85 105,77.77
  Bottom Layer w0.2: U101.23@97.56,92.715 97.56,93.665 97.835,93.94 100.967,93.94 C103.1@101.896,93.011
  Bottom Layer w0.254: v1(93.05,83.02) 93.55,82.52 R109.2@93.55,79.461 ; v1@93.06,83.03 U101.47@93.06,84.565 ; v2(95.5,87.23) 96.34,86.39 U101.35@99.385,86.39 ; U101.23@97.56,92.715 97.56,90.32 v1(97.97,89.91) ; v1(112.215,84.145) C503.1@113.551,85.481 ; C504.1@114.471,78.321 v1(116.42,80.27)
  Bottom Layer w0.3: v1(116.42,80.27) v1(124.995,70.74)
  other v1: 93.6,86.64 95.49,89.33
  other v3: 109.38,80.51 110.48,80.51 109.38,81.61 110.48,81.61
GND: BAT.1 C201.1 C204.1 P5.4 Q1.2 Q2.2 Q3.2 Q4.2 R101.2 R102.2 R103.2 R104.2 R201.2 R202.2 U201.2 U202.2 | length 118.6
  Top Layer w0.45: 90.807,96.674 94.353,96.674 ; U202.2@93.838,90.49 94.342,90.49 94.808,90.024 94.763,89.979 94.763,89.064 94.424,88.724 ; 94.328,94.774 94.778,95.224 94.778,96.249 ; 90.887,88.724 92.69,88.724 94.424,88.724 ; 90.887,88.724 94.424,88.724 ; 90.887,88.724 94.424,88.724 ; 90.887,88.724 94.424,88.724 ; 94.353,96.674 94.663,96.363 94.778,96.249 ; 94.353,96.674 94.778,96.249 ; 94.353,96.674 94.778,96.249 ; 94.353,96.674 94.778,96.249
  Top Layer w0.6: C201.1@90.807,95.575 90.807,96.674 R201.2@90.807,97.928 ; R202.2@90.887,87.453 90.887,88.724 C204.1@90.887,89.873 ; 94.328,94.774 95.12,93.982 v1@95.12,91.15 ; 94.46,90.49 94.955,90.985 v1@95.12,91.15 ; 94.46,90.49 v1@95.12,91.15 ; 94.46,90.49 v1@95.12,91.15 ; 94.46,90.49 v1@95.12,91.15
  Top Layer w0.8: R201.2@90.807,97.928 90.807,98.977 92.06,100.23 P5.4@94.335,100.23 ; Q1.2@102.357,104.801 R101.2@102.357,106.666 ; R101.2@102.48,106.789 102.48,108.12 ; Q2.2@106.887,104.801 R102.2@106.887,106.656 ; R102.2@107.02,106.789 107.02,108.09 ; Q3.2@111.416,104.801 R103.2@111.416,106.645 ; R103.2@111.56,106.789 111.56,107.99 ; Q4.2@115.946,104.801 R104.2@115.946,106.635
  Top Layer w1: P5.4@94.335,100.23 94.335,100.825 BAT.1@96.37,102.86 101.64,108.13 ; R104.2@115.946,107.074 114.89,108.13 ; 101.64,108.13 105.55,108.13 114.533,108.13 114.89,108.13 ; 101.64,108.13 114.89,108.13 ; 101.64,108.13 114.89,108.13 ; 101.64,108.13 114.89,108.13
  other v1: 92.69,89.02 88.12,90.035 94.93,91.01 92.06,96.215 94.91,96.61 111.095,101.075 101.91,101.13 99.49,102.87 105.55,108.045 114.533,108.076 89.945,108.25
IIC_SCL: R105.2 U101.21 U301.23 U303.8 | length 16.6
  Top Layer w0.2: U303.8@105.15,88.42 105.075,88.495 105.075,91.836 105.559,92.32 U301.23@106.05,92.32
  Top Layer w0.254: v1(102.815,94.645) 103.44,94.02 103.44,92.825 104.429,91.836 105.048,91.836
  Bottom Layer w0.254: U101.21@96.56,92.715 96.56,93.911 97.47,94.821 102.639,94.821 v1(102.815,94.645)
IIC_SDA: R106.2 U101.22 U301.24 U303.7 | length 22.5
  Top Layer w0.2: U301.24@106.05,91.82 105.625,91.82 105.475,91.67 105.475,89.745 106.4,88.82 U303.7@106.4,88.42
  Top Layer w0.254: R106.2@102.489,89.71 v1(104.255,89.71) 104.255,87.885 104.73,87.41 105.452,87.41 106.4,88.358 U303.7@106.4,88.42
  Bottom Layer w0.254: U101.22@97.06,92.715 97.06,93.769 97.658,94.367 101.955,94.367 102.668,93.654 102.668,91.298 v1(104.255,89.71)
INT_HMC: U101.29 U302.15 | length 28.5
  Top Layer w0.2: v1(110.1,85.8) 110.18,85.72 112.44,85.72 112.635,85.915 112.635,89.985 v1(112.32,90.3)
  Bottom Layer w0.2: U101.29@99.385,89.39 100.507,89.39 101.76,88.137 101.76,83.15 103.65,81.26 104.24,81.26 104.91,81.93 104.91,83.2 107.51,85.8 v1(110.1,85.8) ; v1(112.32,90.3) 112.45,90.43 U302.15@113.97,90.43
INT_MPU: U101.30 U301.12 | length 33.9
  Top Layer w0.2: v1(106.84,84.2) 107.84,85.2 112.486,85.2 113.035,85.749 113.035,86.465 113.045,86.475 113.045,94.245 112.97,94.32 U301.12@110.15,94.32
  Bottom Layer w0.2: U101.30@99.385,88.89 100.441,88.89 101.36,87.971 101.36,82.984 103.484,80.86 104.406,80.86 105.31,81.764 105.31,82.67 v1(106.84,84.2)
M1: Q1.1 R101.1 U101.16 | length 23
  Top Layer w0.254: v1(101.34,96.72) 103.69,99.07 105.2,99.07 105.75,99.62 105.75,103.308 Q1.1@104.257,104.801
  Top Layer w0.6: Q1.1@104.257,104.801 R101.1@104.257,106.663
  Bottom Layer w0.254: U101.16@94.06,92.715 94.06,94.029 96.751,96.72 v1(101.34,96.72)
M2: Q2.1 R102.1 U101.17 | length 27.1
  Top Layer w0.254: v1(102.34,96.72) 104.21,98.59 109.31,98.59 110.37,99.65 110.37,103.218 Q2.1@108.787,104.801
  Top Layer w0.6: Q2.1@108.787,104.801 R102.1@108.787,106.673
  Bottom Layer w0.2: U101.17@94.56,92.715 94.56,93.925 96.683,96.048 101.668,96.048 v1(102.34,96.72)
M3: Q3.1 R103.1 U101.18 | length 31
  Top Layer w0.254: v1(103.34,96.72) 104.7,98.08 113.27,98.08 114.849,99.659 114.849,103.269 Q3.1@113.316,104.801
  Top Layer w0.6: Q3.1@113.316,104.801 R103.1@113.316,106.684
  Bottom Layer w0.2: U101.18@95.06,92.715 95.06,93.859 96.849,95.648 102.268,95.648 v1(103.34,96.72)
M4: Q4.1 R104.1 U101.19 | length 34.9
  Top Layer w0.254: v1(104.34,96.72) 105.2,97.58 117.23,97.58 119.36,99.71 119.36,103.287 Q4.1@117.846,104.801
  Top Layer w0.6: Q4.1@117.846,104.801 R104.1@117.846,106.694
  Bottom Layer w0.2: U101.19@95.56,92.715 95.56,93.794 97.014,95.248 102.868,95.248 v1(104.34,96.72)
MOTER+: C201.2 C204.2 D1.3 D2.3 D3.3 D4.3 K201.1 P1.2 P2.2 P3.2 P4.2 pad.0@88.84,96.34 U201.1 U201.3 U202.1 U202.3 | length 147.8
  Top Layer w0.5: C204.2@90.807,91.604 C201.2@90.807,93.874 ; C201.2@90.907,93.824 92.728,93.824 ; C204.2@90.971,91.44 U202.1@93.838,91.44 ; 92.783,91.415 92.783,90.024 93.267,89.54 U202.3@93.838,89.54 ; 93.253,93.824 92.728,93.824 ; U201.1@93.758,95.724 93.028,95.724 92.728,95.424 92.728,93.824
  Top Layer w0.6: K201.1@88.602,106.795 88.18,106.373 88.18,102.91 89.553,101.537 ; 89.553,94.349 89.978,93.924 ; 89.553,94.349 89.553,96.34 89.553,101.537 ; 89.553,94.349 89.553,101.537 ; 89.553,94.349 89.553,101.537 ; 89.553,94.349 89.553,101.537 ; 89.978,93.924 C201.2@90.807,93.924 ; 89.978,93.924 C201.2@90.807,93.924 ; 89.978,93.924 C201.2@90.807,93.924 ; 89.978,93.924 C201.2@90.807,93.924
  Bottom Layer w0.6: D1.3@103.31,104.585 107.835,104.585 112.335,104.585 D4.3@116.81,104.585 ; D1.3@103.31,104.585 D4.3@116.81,104.585 ; D1.3@103.31,104.585 D4.3@116.81,104.585 ; D1.3@103.31,104.585 D4.3@116.81,104.585
  Bottom Layer w0.8: K201.1@88.602,106.795 98.465,106.795 100.675,104.585 ; D1.3@103.31,104.585 100.675,104.585 ; P1.2@104.585,100.63 104.585,99.225 ; 109.115,99.555 P2.2@109.115,100.63 ; 113.635,99.525 P3.2@113.635,100.63 ; 117.445,99.225 104.585,99.225 ; 117.45,99.22 118.165,99.935 P4.2@118.165,100.63 ; 100.675,104.585 100.675,100.605 102.055,99.225 104.585,99.225
NetA4_1: A4.1 B401.1 | length 8.4
  Top Layer w0.2: A4.1@107.73,73.65 108.61,73.65 109.325,72.935 B401.1@109.325,66.435
NetA5_1: A5.1 B501.1 | length 3.5
  Top Layer w0.2: B501.1@114.64,79.56 117.453,79.56 A5.1@117.961,79.052
NetA6_1: A6.1 B601.1 | length 4.7
  Bottom Layer w0.2: A6.1@111.62,111.305 111.63,111.315 B601.1@111.63,116.02
NetB401_3: B401.3 U401.26 | length 3.3
  Top Layer w0.2: U401.26@105.745,64.26 106.125,64.26 108.025,66.16 B401.3@108.025,66.435
NetB401_4: B401.4 U401.25 | length 2.8
  Top Layer w0.2: U401.25@105.745,63.76 106.75,63.76 B401.4@108.025,65.035
NetB501_3: B501.3 U501.13 | length 2.9
  Top Layer w0.2: U501.13@111.955,81.06 114.14,81.06 B501.3@114.64,80.56
NetB501_4: B501.4 U501.12 | length 1.6
  Top Layer w0.2: U501.12@111.955,80.56 B501.4@113.54,80.56
NetB501_5: B501.5 C504.2 U501.11 | length 2.7
  Top Layer w0.2: U501.11@111.955,80.06 112.46,80.06 ; v1(112.46,78.94) 112.46,80.06 ; B501.5@113.54,80.06 112.46,80.06
NetB601_3: B601.3 U602.13 | length 2.4
  Bottom Layer w0.2: U602.13@108.22,116.03 B601.3@110.62,116.03
NetB601_4: B601.4 U602.12 | length 2.7
  Bottom Layer w0.2: U602.12@108.22,116.53 110.04,116.53 B601.4@110.63,117.12
NetB601_5: B601.5 C611.2 U602.11 | length 4.2
  Bottom Layer w0.2: U602.11@108.22,117.03 108.65,117.03 v1(109.86,118.24) 110.49,118.24 111.13,117.6 B601.5@111.13,117.12
NetC101_2: C101.2 U101.5 X101.1 | length 13
  Bottom Layer w0.254: U101.5@91.235,87.89 91.212,87.867 90.312,87.867 90.033,87.588 90.033,84.897 92.98,81.95 92.98,80.57 91.94,79.53 X101.1@91.79,79.53 ; C101.2@91.57,77.499 X101.1@91.57,79.31
NetC102_2: C102.2 U101.6 X101.3 | length 10.5
  Bottom Layer w0.254: C102.2@87.491,81.29 X101.3@89.53,81.29 ; X101.3@89.579,81.241 89.579,87.776 90.193,88.39 U101.6@91.235,88.39 U101.6@91.212,88.367
NetC202_2: C202.2 U201.4 | length 2.4
  Top Layer w0.4: U201.4@96.508,93.824 C202.2@98.954,93.824
NetC205_2: C205.2 U202.4 | length 2.5
  Top Layer w0.4: U202.4@96.588,89.54 96.588,88.498 C205.2@97.633,87.453
NetC302_2: C302.2 U301.20 | length 1.6
  Top Layer w0.2: C302.2@104.446,93.82 U301.20@106.05,93.82
NetC303_2: C303.2 U301.10 | length 2.1
  Top Layer w0.2: U301.10@110.15,93.32 110.6,93.32 110.801,93.521 C303.2@112.171,93.521
NetC305_1: C305.1 U302.12 | length 5.6
  Top Layer w0.254: v1(113.655,88.545) 113.655,91.017 C305.1@115.094,92.456
  Bottom Layer w0.254: v1(113.655,88.545) 113.92,88.81 U302.12@114.59,88.81
NetC305_2: C305.2 U302.8 | length 4.4
  Top Layer w0.254: C305.2@116.745,92.456 117.745,91.456 v1(117.745,89.445)
  Bottom Layer w0.254: U302.8@116.71,89.43 v1@117.73,89.43
NetC306_2: C306.2 U302.10 | length 2.6
  Bottom Layer w0.254: U302.10@115.59,88.81 115.59,86.721 C306.2@115.945,86.366
NetC401_1: C401.1 U401.40 | length 4.2
  Top Layer w0.2: C401.1@97.401,65.371 97.401,66.156 98.265,67.02 U401.40@100.485,67.02
NetC402_2: C402.2 U401.32 X402.2 | length 5.4
  Top Layer w0.2: X402.2@102.306,70.269 C402.2@104.47,70.269 ; U401.32@104.485,67.02 C402.2@104.485,70.254